# Altium PCB PCB1 - Copy.PcbDoc (part 2 of 2)
Units mil, origin at the board's own origin, x right, y up, seen from the top; angles counter-clockwise.
Board outline 4250 x 4000 mil, 2 copper layers (Top Layer, Bottom Layer); 130 components, 77 nets, 452 pads, 327 vias.
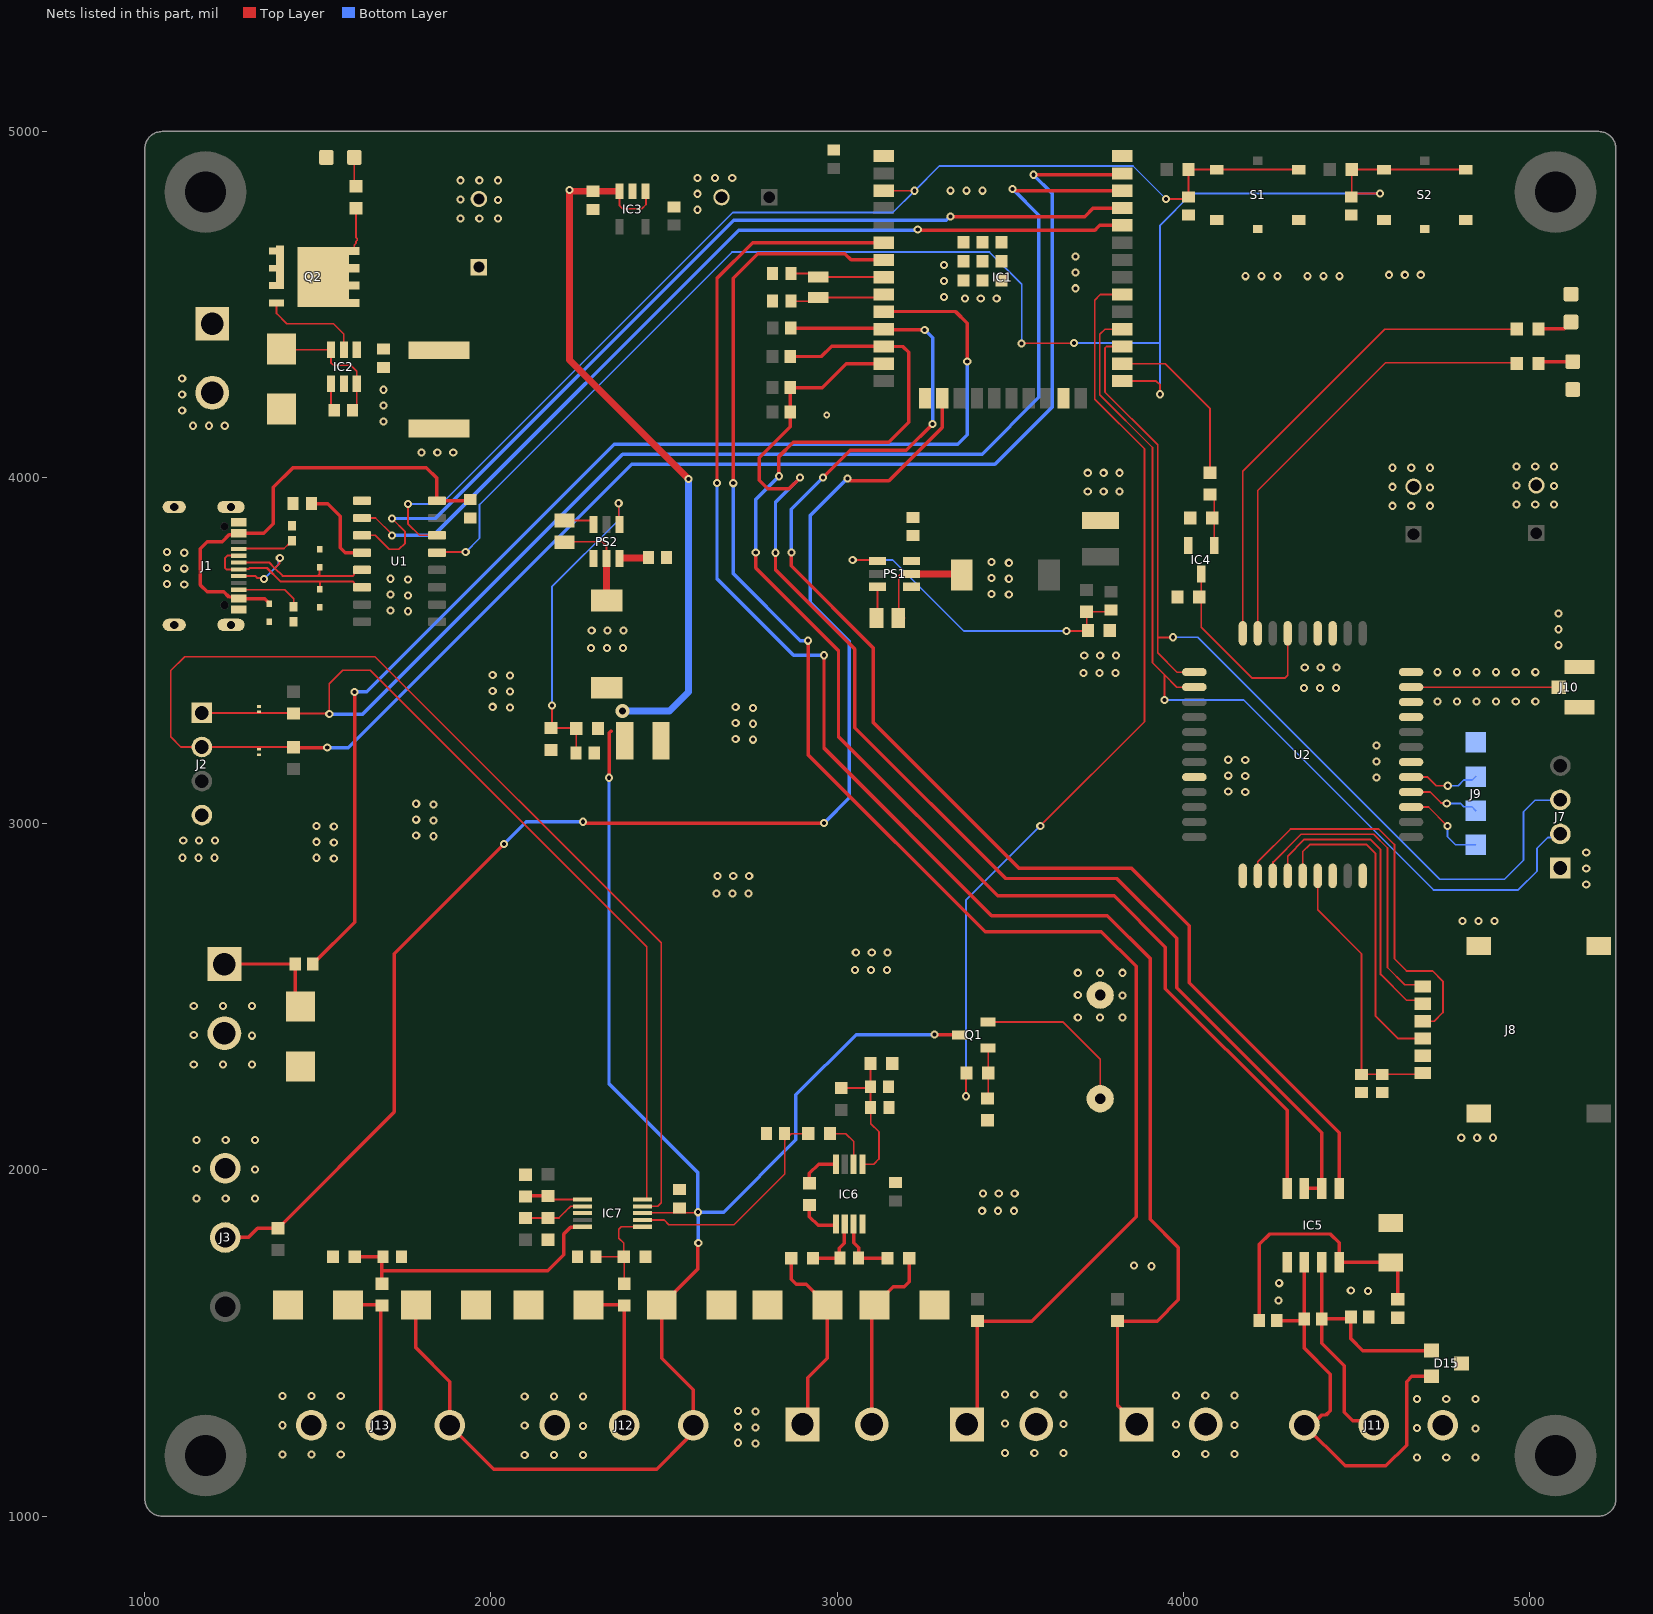
[diagram p2: the nets of this part, all layers, seen from the top]

## Via types
v1: diameter 23.62, hole 11.81, Top Layer to Bottom Layer, 324 vias
v2: diameter 39.37, hole 19.68, Top Layer to Bottom Layer, 1 vias
v3: diameter 78.74, hole 39.37, Top Layer to Bottom Layer, 1 vias
v4: diameter 19.68, hole 9.84, Top Layer to Bottom Layer, 1 vias

## Nets (pads, with @x,y where several pads share a name; then routed paths per layer and width w, separated by ;. In a path a pad name is that pad's centre, name@x,y a point inside that pad or via, vN(x,y) a via of type N, cw(c..) or ccw(c..) an arc to the next point about the centre after c; other vN are vias at no path point) (continued)
+5: C11.1 C22.2 C23.2 C33.1 D11.1 D12.1 IC3.1 IC3.3 IC7.8 J12.3 J13.3 L3.2 Q1.3 R15.2 | length 6728.6
  Top Layer w5: IC3.3@2371.6,4827.18 2371.6,4785.4 2380,4777 2436,4777 2448,4789 2448,4825.58 IC3.1@2446.4,4827.18 ; IC7.8@2438.23,1875.32 2439.51,1876.59 2596.59,1876.59 v1(2598,1878)
  Top Layer w10: D12.1@1783.39,1610 1783.39,1486.61 1881.36,1388.64 J13.3@1881.36,1263.03 2008.4,1136 2478.93,1136 2563.41,1220.47 2584.7,1241.77 2584.7,1365.3 2493.39,1456.61 D11.1@2493.39,1610 2494.37,1610 2531.69,1647.32 2531.69,1648.31 2598,1714.61 2598,1788 v1(2599,1789) ; v1(2341,3133) 2341.72,3133.72 2341.72,3262.72 2347,3268 ; v1(3281,2391) 3281.5,2390.5 3353.16,2390.5 Q1.3@3353.66,2390
  Top Layer w20: IC3.3@2371.6,4827.18 2371.5,4827.28 2295.1,4827.28 C11.1@2295,4827.38 2231.6,4827.38 2227.98,4831 v1(2227,4831) 2227,4340 v1(2571,3996)
  Bottom Layer w10: v1(2341,3133) 2341,2249 2598,1992 v1(2598,1878) ; v1(2599,1789) 2598.5,1789.5 2598.5,1877.5 v1(2598,1878) ; v1(3281,2391) 3055,2391 2881,2217 2881,2087 2672,1878 v1(2598,1878)
  Bottom Layer w20: v2(2380,3326) 2516,3326 2571,3381 v1(2571,3996)
+5V: C28.2 C29.2 IC5.8 R22.2 | length 794.6
  Top Layer w10: R22.2@4219.41,1565 4220,1565.59 4220,1785 4250,1815 4425,1815 4450,1790 IC5.8@4450,1733.23 4599.69,1733.23 C29.2@4600,1732.91 4620,1712.91 C28.2@4620,1626.57
+VIN: C8.1 C9.2 C10.1 C17.2 C21.2 IC2.4 PS1.3 PS2.3 Q2.5 Q2.6 Q2.7 Q2.8 Q2.9 R12.1 | length 218.3
  Top Layer w5: Q2.8@1605.16,4655 1605.16,4671.81 1610.16,4676.81 1610.16,4682.16 1613.93,4685.93 1613.93,4690.07 1610,4694 R12.1@1610,4778.5 R12.1@1613.5,4775
  Top Layer w20: PS2.3@2371.4,3765.79 2373.01,3767.39 2453.02,3767.39 C21.2@2454.62,3769
ADC_1: C31.1 IC7.5 R31.2 R32.1 | length 828.7
  Top Layer w10: R32.1@1606.5,1749.25 1688.43,1749.25 C31.1@1688.62,1749.06 1685,1745.43 1685,1708.46 ; R31.2@1685,1671.5 1685,1708.46 ; IC7.5@2265,1834.72 2229.72,1834.72 2210,1815 2210,1755 2163.46,1708.46 1685,1708.46
ADC_2: C30.1 IC7.6 R29.2 R30.1 | length 316.4
  Top Layer w5: C30.1@2303.27,1749.06 2303.46,1749.25 R30.1@2383.5,1749.25 ; R29.2@2385,1671.5 2385,1747.76 R30.1@2383.5,1749.25 ; IC7.6@2438.23,1835.94 2375.94,1835.94 2369.14,1829.14 2369.14,1803.23 2383.5,1788.87 R30.1@2383.5,1749.25
BOOT: C5.1 IC1.25 R4.1 S2.1 S2.2 U1.13 | length 4511.8
  Top Layer w5: U1.13@1844.05,3783.43 1845.62,3785 v1(1927,3785) ; v1(3533,4388) 3533.5,4388.5 3683.5,4388.5 v1(3684,4389) ; IC1.25@3823.43,4278.94 3922.06,4278.94 3933,4268 v1(3933,4241) ; C5.1@4485,4811.38 C5.1@4486.5,4812.87 ; v1(4568,4821) 4494.62,4821 C5.1@4486.5,4812.87 ; S2.2@4816.22,4890 S2.1@4580,4890 R4.1@4486.5,4890 C5.1@4486.5,4812.87
  Bottom Layer w5: v1(1927,3785) 1966.75,3824.75 1966.75,3922.13 2696.62,4652 3440,4652 3533,4559 v1(3533,4388) ; v1(3684,4389) 3933,4389 ; v1(3933,4241) 3933,4389 ; v1(4568,4821) 4025,4821 3933,4729 3933,4389
BUZZER: IC1.30 R8.2 | length 2727
  Top Layer w5: v1(3372,2213) 3372,2278.5 R8.2@3373.5,2280 ; v1(3587,2994) 3888,3295 3888,4083 3744,4227 3744,4513 3759.94,4528.94 IC1.30@3823.43,4528.94
  Bottom Layer w5: v1(3372,2213) 3372,2779 v1(3587,2994)
DAC_1: IC1.10 R33.1 | length 3491.7
  Top Layer w10: R33.1@1485.59,2595 1606,2715.41 v1(1606,3381) ; IC1.10@3134.45,4478.94 3135.51,4480 3342,4480 3376,4446 v1(3376,4336)
  Bottom Layer w10: v1(1606,3381) 1641,3381 2356,4096 3348,4096 3376,4124 v1(3376,4336)
DBG_RX: IC1.35 U1.3 | length 2716.3
  Top Layer w5: U1.3@1627.52,3833.43 1665.57,3833.43 1706,3793 1734,3793 1751.86,3810.86 1751.86,3844.14 v1(1714,3882)
  Top Layer w10: v1(3328,4754) 3715,4754 3739.94,4778.94 IC1.35@3823.43,4778.94
  Bottom Layer w10: v1(1714,3882) 1839,3882 2701,4744 3315.33,4744 3325.33,4754 v1(3328,4754)
DBG_TX: IC1.34 U1.2 | length 2591.8
  Top Layer w5: U1.2@1627.52,3883.43 1666.57,3883.43 1714,3836 v1(1714,3833) v1@1713.79,3833.21
  Top Layer w10: v1(3233,4717.19) 3235.19,4715 3745,4715 3753,4723 3753,4723.08 3758.86,4728.94 IC1.34@3823.43,4728.94
  Bottom Layer w10: v1(1714,3833) 1834,3833 2716,4715 3230.81,4715 v1(3233,4717.19)
DE: IC1.13 IC5.2 IC5.3 R24.1 R25.1 | length 3718.6
  Top Layer w10: v1(2822,3783) 2822,3734 3051,3505 3051,3278 3487,2842 3808.14,2842 3981,2669.14 3981,2526 4400,2107 IC5.2@4400,1946.77 IC5.3@4350,1946.77 ; v1(2893,4000) 2861,3968 2800,3968 2775,3993 2775,4058 2864.59,4147.59 R24.1@2864.59,4190 R25.1@2864.59,4260 2957,4260 3026,4329 3134.39,4329 IC1.13@3134.45,4328.94
  Bottom Layer w10: v1(2822,3783) 2822,3929 v1(2893,4000)
DI: IC1.12 IC5.4 R23.1 | length 3954.9
  Top Layer w10: v1(2765,3784) 2765,3739 3004,3500 3004,3252 3464,2792 3800,2792 3948,2644 3948,2524 4300,2172 IC5.4@4300,1946.77 ; v1(2832,4004) 2832,4061 2873,4102 3149,4102 3207,4160 3207,4362 3190.06,4378.94 IC1.12@3134.45,4378.94 3133.39,4380 2984,4380 2954,4350 R23.1@2864.59,4350
  Bottom Layer w10: v1(2765,3784) 2765,3937 v1(2832,4004)
DIF_ADC: C36.1 IC7.7 R41.2 | length 669.1
  Top Layer w5: IC7.7@2438.23,1855.63 2500.37,1855.63 2514,1842 2702,1842 2848.38,1988.38 2848.38,2086.38 ; C36.1@2848.38,2105.2 2848.38,2086.38 ; R41.2@2916.5,2105 2867,2105 2856.51,2094.51 2848.38,2086.38
DIGITAL_IN: IC1.6 J4.1 R9.1 | length 4797.2
  Top Layer w10: v1(2653,3985) 2653,4576 2755.94,4678.94 IC1.6@3134.45,4678.94 ; v1(2962.05,3486.9) 2962.05,3218.95 3446,2735 3780,2735 3904,2611 3904,1858 3986,1776 3986,1625 3924.5,1563.5 R9.1@3810,1563.5 3810,1320 J4.1@3865,1265
  Bottom Layer w10: v1(2653,3985) 2653,3708 2874.1,3486.9 v1(2962.05,3486.9)
FLOAT_IN: IC1.7 J5.1 R10.1 | length 4769
  Top Layer w10: v1(2700,3984) 2700,4576 2771,4647 3022,4647 3040.06,4628.94 IC1.7@3134.45,4628.94 ; v1(2916,3529) 2916,3200 3427.5,2688.5 3763.5,2688.5 3864,2588 3864,1865 3562.5,1563.5 R10.1@3405,1563.5 3405,1295 J5.1@3375,1265
  Bottom Layer w10: v1(2700,3984) 2700,3723 2894,3529 v1(2916,3529)
GND: C1.1 C2.1 C3.2 C4.2 C5.2 C6.1 C7.1 C8.2 C9.1 C10.2 C11.2 C12.2 C17.1 C19.1 C21.1 C23.1 C24.1 C25.1 C26.N C27.N C28.1 C29.1 C30.2 C31.2 C32.2 C33.2 C34.N C36.2 C37.2 C38.2 D1.1 D2.1 D3.1 D4.1 D5.1 D6.2 D7.C D8.C D9.C D10.2 D11.2 D12.2 D13.2 D14.2 D15.3 D16.2 D17.2 IC1.1 IC1.15 IC1.38 IC1.39 IC1.40 IC1.41 IC1.42 IC1.43 IC1.44 IC1.45 IC1.46 IC1.47 IC2.2 IC3.2 IC4.2 IC5.5 IC6.4 IC7.3 J1.A1_B12 J1.B1_A12 J1.S1 J1.S2 J1.S3 J1.S4 J2.4 J3.1 J4.2 J5.2 J6.2 J7.1 J8.C5 J8.S1 J8.S2 J8.S3 J9.1 J10.2 J10.3 J11.3 J12.1 J13.1 J14.2 LS1.2 PS1.1 PS2.1 R1.2 R2.1 R11.2 R14.1 R16.1 R19.1 R20.2 R28.1 R30.2 R32.2 R39.2 R40.2 R43.1 S1.3 S1.4 S1.G2 S2.3 S2.4 S2.G2 U1.1 U2.8 U2.13 U2.19 U2.21 U2.27 U2.30 U2.31 U2.33 U2.36 U2.37
  other v1: 4675.37,1169.6 4759.68,1169.6 4844,1169.6 2097.37,1176.6 2181.68,1176.6 2266,1176.6 1397.37,1177.6 1481.68,1177.6 1566,1177.6 3979.37,1179.6 4063.68,1179.6 4148,1179.6 3485.37,1182.6 3569.68,1182.6 3654,1182.6 2764,1210 2714,1212 4844,1253 4675.37,1254.6 2764,1256 2714,1258 2266,1260 1566,1261 2097.37,1261.6 1397.37,1262.6 4148,1263 3979.37,1264.6 3654,1266 3485.37,1267.6 2764,1302 2714,1304 4675.37,1338.6 4759.68,1338.6 4844,1338.6 2097.37,1345.6 2181.68,1345.6 2266,1345.6 1397.37,1346.6 1481.68,1346.6 1566,1346.6 3979.37,1348.6 4063.68,1348.6 4148,1348.6 3485.37,1351.6 3569.68,1351.6 3654,1351.6 4275,1623 4534,1650 4484,1652 4277,1673 3908,1722 3858,1724 3419,1882 3465,1882 3511,1882 1149.37,1917.6 1233.68,1917.6 1318,1917.6 3421,1932 3467,1932 3513,1932 1318,2001 1149.37,2002.6 1149.37,2086.6 1233.68,2086.6 1318,2086.6 4803,2093 4849,2093 4895,2093 1141.37,2304.6 1225.68,2304.6 1310,2304.6 1310,2388 1141.37,2389.6 3695.37,2440.6 3759.68,2440.6 3824,2440.6 1141.37,2473.6 1225.68,2473.6 1310,2473.6 3824,2504 3695.37,2505.6 3695.37,2569.6 3759.68,2569.6 3824,2569.6 3052,2578 3098,2578 3144,2578 3054,2628 3100,2628 3146,2628 4807,2719 4853,2719 4899,2719 2652,2799 2698,2799 2744,2799 5164,2825 2654,2849 2700,2849 2746,2849 5164,2871 1546,2900 1109,2902 1155,2902 1201,2902 1496,2902 5164,2917 1546,2946 1496,2948 1111,2952 1157,2952 1203,2952 1834,2964 1784,2966 1546,2992 1496,2994 1834,3010 1784,3012 1834,3056 1784,3058 4179,3092 4130,3093 4558,3134 4179,3138 4130,3139 4558,3180 4179,3184 4130,3185 4558,3226 2757,3243 2707,3245 2757,3289 2707,3291 2757,3335 2055,3336 2707,3337 2005,3338 4734,3353 4790.6,3353 4847.2,3353 4903.8,3353 4960.4,3353 5017,3353 2055,3382 2005,3384 4349,3392 4395,3392 4441,3392 2055,3428 2005,3430 3712,3436 3758,3436 3804,3436 4734,3438 4790.6,3438 4847.2,3438 4903.8,3438 4960.4,3438 5017,3438 4351,3452 4397,3452 4443,3452 3714,3486 3760,3486 3806,3486 2289,3508 2335,3508 2381,3508 5084,3516 2291,3558 2337,3558 2383,3558 5084,3562 5084,3608 1760,3614 1710,3616 1760,3660 1710,3662 3496,3662 3446,3664 1114,3691 1064,3693 1760,3706 1710,3708 3496,3708 3446,3710 1114,3737 1064,3739 3496,3754 3446,3756 1114,3783 1064,3785 4604.37,3918.6 4658.68,3918.6 4713,3918.6 4962.37,3922.6 5016.68,3922.6 5071,3922.6 3724,3960 3770,3960 3816,3960 4713,3972 4604.37,3973.6 5071,3976 4962.37,3977.6 3724,4014 3770,4014 3816,4014 4604.37,4028.6 4658.68,4028.6 4713,4028.6 4962.37,4032.6 5016.68,4032.6 5071,4032.6 1799,4073 1845,4073 1891,4073 1139,4150 1185,4150 1231,4150 1690,4162 1108,4194 1690,4208 1108,4240 1690,4254 1108,4286 3369,4518 3415,4518 3461,4518 3309,4522 3689,4547 3309,4568 4180,4582 4226,4582 4272,4582 4359,4582 4405,4582 4451,4582 4594,4586 4640,4586 4686,4586 3689,4593 3309,4614 3689,4639 1912,4749 1966.32,4749 2020.63,4749 2597,4774 2020.63,4802.4 1912,4804 2597,4820 3328,4829 3374,4829 3420,4829 1912,4859 1966.32,4859 2020.63,4859 2597,4866 2647,4866 2697,4866
  other v4: 2970,4181
I2C_1_CLK: D4.2 IC1.37 IC7.9 J2.2 R6.1 | length 6700.8
  Top Layer w5: R6.1@1430,3236.5 1417.28,3223.78 1412.37,3223.78 1410.44,3221.85 J2.2@1165,3221.85 1104.15,3221.85 1075,3251 1075,3443 1115,3483 1665,3483 2492,2656 2492,1905 2482,1895 IC7.9@2438.23,1895
  Top Layer w10: R6.1@1430,3221.5 1431.5,3220 v1(1527,3220) ; v1(3567,4875) 3819.49,4875 IC1.37@3823.43,4878.94
  Bottom Layer w10: v1(1527,3220) 1588,3220 2407,4039 3456,4039 3621,4204 3621,4821 v1(3567,4875)
I2C_1_SDA: D5.2 IC1.36 IC7.10 J2.1 R5.1 | length 5831.2
  Top Layer w5: J2.1@1165,3320.28 1428.23,3320.28 R5.1@1430,3318.5 1531.5,3318.5 v1(1533,3317) 1533,3405 1572,3444 1651,3444 2450.02,2644.98 IC7.10@2450.02,1916.3
  Top Layer w10: v1(3507,4834) 3510.69,4834 3515.75,4828.94 IC1.36@3823.43,4828.94
  Bottom Layer w10: v1(1533,3317) 1629,3317 2380,4068 3419,4068 3583,4232 3583,4758 v1(3507,4834)
LSE_OSC_IN: C7.2 IC1.8 Y1.1 | length 272.7
  Top Layer w5: C7.2@2866.38,4590 2934.53,4590 Y1.1@2945,4579.53 3133.86,4579.53 IC1.8@3134.45,4578.94
LSE_OSC_OUT: C6.2 IC1.9 Y1.2 | length 275.9
  Top Layer w5: C6.2@2866.38,4510 2934.53,4510 Y1.2@2945,4520.47 3125.98,4520.47 IC1.9@3134.45,4528.94
NetC2_2: C2.2 U1.4 | length 258.1
  Top Layer w10: C2.2@1481.38,3925 1528,3925 1565,3888 1565,3797 1578.57,3783.43 U1.4@1627.52,3783.43
NetC15_1: C15.1 D6.1 IC2.3 IC2.6 J6.1 Q2.1 Q2.2 Q2.3 Q2.10 | length 383.2
  Top Layer w5: D6.1@1395,4371.61 1397.4,4369.21 IC2.6@1537.6,4369.21 1537.6,4332.4 1545,4325 1595,4325 1612.4,4307.6 IC2.3@1612.4,4270.79 1612.4,4207.4 C15.1@1600,4195
NetC15_2: C15.2 IC2.1 | length 79.8
  Top Layer w5: IC2.1@1537.6,4270.79 1537.6,4204.65 C15.2@1547.24,4195
NetC16_1: C16.1 L2.1 PS1.2 | length 339
  Top Layer w5: C16.1@3170.07,3619.17 C16.1@3195.24,3594 ; C16.1@3178.07,3619.17 3178.07,3716.07 3186,3724 PS1.2@3215.21,3724 ; L2.1@3340.02,3739 L2.1@3360.02,3719
  Top Layer w20: PS1.2@3223.58,3722.19 3356.83,3722.19 L2.1@3360.02,3719
NetC16_2: C16.2 PS1.6 | length 94.6
  Top Layer w5: PS1.6@3116.79,3686.6 3116.79,3598.72 C16.2@3121.5,3594
NetC18_1: C18.1 PS1.4 R13.1 R14.2 | length 965.2
  Top Layer w5: v1(3045,3762) 3114.19,3762 PS1.4@3116.79,3759.4 ; v1(3663,3557) 3722.5,3557 R14.2@3724.5,3559 3721,3562.5 R13.1@3721,3612.5 3785.88,3612.5 C18.1@3791,3617.62
  Bottom Layer w5: v1(3045,3762) 3161,3762 3366,3557 v1(3663,3557)
NetC20_1: C20.1 L3.1 PS2.2 | length 283
  Top Layer w5: C20.1@2214,3815 2322,3815 2334,3803 PS2.2@2334,3765.79
  Top Layer w20: L3.1@2334,3645 PS2.2@2334,3765.79
NetC20_2: C20.2 PS2.6 | length 91.4
  Top Layer w5: C20.2@2212,3876.5 2287.29,3876.5 2296.6,3867.19 PS2.6@2296.6,3864.21
NetC22_1: C22.1 PS2.4 R15.1 R16.2 | length 938.4
  Top Layer w5: v1(2176,3342) 2176,3278.5 R16.2@2174,3276.5 2244.51,3276.5 R15.1@2246.01,3275 2246.01,3211.61 C22.1@2252.62,3205 ; v1(2369,3926) 2369,3866.61 PS2.4@2371.4,3864.21
  Bottom Layer w5: v1(2176,3342) 2176,3684.84 2369,3877.84 v1(2369,3926)
NetC35_1: C35.1 IC6.2 R35.2 | length 176.3
  Top Layer w10: R35.2@2930.5,1745 3001.5,1745 3004.54,1745 C35.1@3004.73,1745.2 ; C35.1@3001.5,1750 3005.65,1754.15 3005.65,1773.65 3020.47,1788.47 3020.47,1841.65 IC6.2@3022.2,1843.39
NetC35_2: C35.2 IC6.3 R36.2 | length 187.1
  Top Layer w10: IC6.3@3047.8,1843.39 3047.8,1790.2 3062.9,1775.1 C35.2@3062.9,1750.61 ; C35.2@3057.49,1745.2 3057.69,1745 R36.2@3145.5,1745
NetC37_1: C37.1 C38.1 IC6.5 R42.1 R43.2 | length 425.9
  Top Layer w5: R42.1@3012,2236.5 3092.06,2236.5 C38.1@3096.06,2240.5 ; IC6.5@3073.39,2016.61 3105.61,2016.61 3121,2032 3121,2110 3097.06,2133.94 C37.1@3097.06,2180.5 3096.5,2181.06 R43.2@3096.5,2308
NetD7_A: D7.A R12.2 | length 85.4
  Top Layer w5: D7.A@1605.35,4925 1605.35,4846.14 R12.2@1610,4841.5
NetD8_A: D8.A R17.2 | length 100.7
  Top Layer w10: R17.2@5026.5,4330 5031.85,4335.35 D8.A@5125,4335.35
NetD9_A: D9.A R21.2 | length 101.6
  Top Layer w10: R21.2@5026.5,4430 5100.01,4430 5119.66,4449.65 D9.A@5120,4449.65
NetD10_1: D10.1 J12.2 R29.1 | length 449.6
  Top Layer w10: D10.1@2281.61,1610 2383.5,1610 R29.1@2385,1608.5 2384.7,1608.2 J12.2@2384.7,1263.03
NetD13_1: D13.1 J13.2 R31.1 | length 446
  Top Layer w10: D13.1@1586.61,1610 1683.5,1610 R31.1@1685,1608.5 1681.36,1604.87 J13.2@1681.36,1263.03
NetD14_1: D14.1 J14.1 R33.2 | length 334.3
  Top Layer w10: J14.1@1230,2595 R33.2@1434.41,2595 1434.41,2487.2 D14.1@1450,2471.61
NetD15_1: D15.1 IC5.7 J11.2 R27.2 R28.2 | length 955.5
  Top Layer w10: IC5.7@4400,1733.23 4400,1570.59 R27.2@4400.59,1570 ; J11.2@4550,1263.03 4538.03,1275 4490,1275 4465,1300 4465,1435 4400.59,1499.41 R27.2@4400.59,1570 ; D15.1@4716.69,1478.4 4716.29,1478 4519,1478 4484.41,1512.59 R28.2@4484.41,1575 4479.41,1570 R27.2@4400.59,1570
NetD15_2: D15.2 IC5.6 J11.1 R22.1 R27.1 | length 1263
  Top Layer w10: R22.1@4270.59,1565 4344.41,1565 R27.1@4349.41,1570 ; IC5.6@4350,1733.23 4350,1570.59 R27.1@4349.41,1570 ; D15.2@4716.69,1403.6 4660.6,1403.6 4645,1388 4645,1205 4585,1145 4468.03,1145 J11.1@4350,1263.03 4371.26,1263.03 4400.44,1292.21 4412.21,1292.21 4425,1305 4425,1410 4349.41,1485.59 R27.1@4349.41,1570
NetD16_1: D16.1 J15.2 R36.1 | length 540
  Top Layer w10: J15.2@3100,1265 3100,1601.61 D16.1@3108.39,1610 3109.37,1610 3162.37,1663 3194,1663 3208.5,1677.5 R36.1@3208.5,1741
NetD17_1: D17.1 J15.1 R35.1 | length 570.1
  Top Layer w10: R35.1@2867.5,1745 2867.5,1684.5 2882,1670 2910.63,1670 2970.63,1610 D17.1@2971.61,1610 2971.61,1456.61 2915,1400 2915,1280 J15.1@2900,1265
NetIC2_5: IC2.5 Q2.4 | length 295.3
  Top Layer w5: Q2.4@1380.75,4505 1380.75,4474.25 1410,4445 1545,4445 1575,4415 IC2.5@1575,4369.21
NetIC4_1: IC4.1 R18.1 R19.2 | length 152.4
  Top Layer w5: R18.1@4077,3951.5 4089.6,3938.91 IC4.1@4089.6,3804.34
NetIC4_3: IC4.3 R20.1 U2.39 | length 593.1
  Top Layer w5: IC4.3@4052,3721.66 4052,3660.5 R20.1@4046.5,3655 4052,3649.5 4052,3568 4199,3421 4293,3421 4301.69,3429.69 U2.39@4301.69,3550.39
NetIC6_1: IC6.1 R34.1 | length 121.9
  Top Layer w10: R34.1@2920,1898.5 2920,1865 2945,1840 2993.23,1840 IC6.1@2996.61,1843.39
NetIC6_6: IC6.6 R41.1 | length 143.3
  Top Layer w5: R41.1@2979.5,2105 3025,2105 3047.8,2082.2 IC6.6@3047.8,2016.61
NetIC6_8: IC6.8 R34.2 | length 116.1
  Top Layer w10: R34.2@2920,1961.5 2920,1990 2946.61,2016.61 IC6.8@2996.61,2016.61
NetIC7_1: IC7.1 R38.2 R40.1 | length 169.9
  Top Layer w5: R38.2@2165,1925 2175.31,1914.69 IC7.1@2265,1914.69
  Top Layer w10: R40.1@2100,1923.5 2101.5,1925 R38.2@2165,1925
NetIC7_2: IC7.2 R37.2 R39.1 | length 183.9
  Top Layer w5: R37.2@2095,1861.5 R37.2@2100,1861.5 R39.1@2165,1861.5 2196.5,1861.5 2215,1880 2230,1895 IC7.2@2265,1895
NetJ1_A5: J1.A5 R1.1 | length 164.3
  Top Layer w5: J1.A5@1272.01,3794.21 1273.23,3795.43 1402.24,3795.43 1413.88,3807.07 1415.85,3807.07 1425.16,3816.38 R1.1@1425.16,3818.35
NetJ1_B5: J1.B5 R2.2 | length 192.2
  Top Layer w5: J1.B5@1272.01,3676.1 1403.9,3676.1 1430,3650 R2.2@1430,3626.65
NetJ9_2: J9.2 U2.26 | length 208.4
  Top Layer w5: U2.26@4657.99,3135.04 4705.96,3135.04 4731,3110 v1(4764,3110)
  Bottom Layer w5: v1(4764,3110) 4794,3110 4810.74,3126.74 4835.17,3126.74 J9.2@4845,3136.57
NetJ9_3: J9.3 U2.25 | length 209.2
  Top Layer w5: U2.25@4657.99,3091.73 4713.27,3091.73 4744.85,3060.15 4759.85,3060.15 v1(4761,3059)
  Bottom Layer w5: v1(4761,3059) 4801,3059 4810.74,3049.26 4833.89,3049.26 J9.3@4845,3038.15
NetJ9_4: J9.4 U2.24 | length 250.1
  Top Layer w5: U2.24@4657.99,3048.43 4708.42,3048.43 v1(4763.35,2993.49)
  Bottom Layer w5: v1(4763.35,2993.49) 4763.35,2962.65 4786.28,2939.72 J9.4@4845,2939.72
NetJ10_1: J10.1 U2.32 | length 429
  Top Layer w5: U2.32@4657.99,3394.88 5080.08,3394.88 J10.1@5084.96,3390
NetLS1_1: LS1.1 Q1.2 | length 482.5
  Top Layer w5: Q1.2@3436.34,2427.8 3652.2,2427.8 3760,2320 LS1.1@3760,2205.79
NetQ1_1: Q1.1 R8.1 R11.1 | length 146.3
  Top Layer w5: R11.1@3435,2206.5 3436.34,2207.83 Q1.1@3436.34,2352.2
NetR17_1: R17.1 U2.41 | length 1314.8
  Top Layer w5: U2.41@4215.08,3550.39 4215.08,3963.08 4584,4332 4961.5,4332 R17.1@4963.5,4330
NetR21_1: R21.1 U2.42 | length 1430.4
  Top Layer w5: U2.42@4171.77,3550.39 4171.77,4018.77 4582,4429 4962.5,4429 R21.1@4963.5,4430
NRST: C4.1 IC1.3 R3.1 S1.1 S1.2 U1.14 | length 3372.3
  Top Layer w5: v1(1760,3924) 1760,3867.02 1793.6,3833.43 U1.14@1844.05,3833.43 ; IC1.3@3134.45,4828.94 v1(3224,4828.94) ; v1(3950,4805) 4008.62,4805 C4.1@4015,4811.38 R3.1@4015,4873.8 ; S1.2@4333.11,4890 4035,4890 ; R3.1@4015,4873.8 R3.1@4015,4890 4035,4890 ; R3.1@4015,4873.8 4020.71,4879.51 4024.51,4879.51 4024.51,4884.29 4030.22,4890 4035,4890
  Bottom Layer w5: v1(1760,3924) 1856.25,3924 2698.25,4766 3161.06,4766 v1(3224,4828.94) 3295.37,4900.31 3854.69,4900.31 v1(3950,4805)
RO: IC1.11 IC5.1 R26.1 | length 3989.6
  Top Layer w10: R26.1@2865.59,4432 3131.39,4432 IC1.11@3134.45,4428.94 3136.39,4427 v1(3253,4427) ; v1(2868,3784) 2867,3783 2867,3745 3105,3507 3105,3292 3526,2871 3851,2871 4017,2705 4017,2541 4450,2108 IC5.1@4450,1946.77 ; v1(2959,4000) 3037.8,4078.8 3199.8,4078.8 v1(3276,4155)
  Bottom Layer w10: v1(2868,3784) 2868,3909 v1(2959,4000) ; v1(3253,4427) 3276,4404 v1(3276,4155)
SIM_CLK: J8.C3 U2.16 | length 875.3
  Top Layer w5: U2.16@4301.69,2849.61 4301.69,2906.69 4350,2955 4540,2955 4570,2925 4570,2565 4645,2490 4682.28,2490 J8.C3@4692.28,2480
SIM_DATA: J8.C7 U2.15 | length 890.8
  Top Layer w5: U2.15@4258.39,2849.61 4259.46,2850.68 4259.46,2889.46 4340,2970 4550,2970 4590,2930 4590,2585 4640,2535 4687.28,2535 J8.C7@4692.28,2530
SIM_DET: J8.C6 U2.14 | length 1148.3
  Top Layer w5: U2.14@4215.08,2849.61 4215.08,2890.08 4310,2985 4565,2985 4610,2940 4610,2610 4645,2575 4720,2575 4750,2545 4750,2455 4725,2430 J8.C6@4692.28,2430
SIM_EN: IC1.26 R18.2 | length 492.5
  Top Layer w5: IC1.26@3823.43,4328.94 3948.06,4328.94 4077,4200 R18.2@4077,4014.5
SIM_RST: J8.C2 U2.17 | length 933.2
  Top Layer w5: U2.17@4345,2849.61 4345,2920 4365,2940 4530,2940 4555,2915 4555,2445 4620,2380 J8.C2@4692.28,2380
SIM_RX: IC1.27 J7.3 U2.1 | length 2754.3
  Top Layer w5: IC1.27@3823.43,4378.94 3778.06,4378.94 3774,4374.87 3774,4247 3926,4095 3926,3538 ; v1(3970,3539) 3969,3538 3926,3538 ; U2.1@4032.01,3438.19 3981.81,3438.19 3926,3494 3926,3538
  Bottom Layer w5: v1(3970,3539) 4042,3539 4741,2840 4928,2840 4983,2895 4983,3035 5016,3068 5088.12,3068 J7.3@5089.33,3069.21
SIM_TX: IC1.28 J7.2 U2.2 | length 2781
  Top Layer w5: IC1.28@3823.43,4428.94 3773.94,4428.94 3759,4414 3759,4239 3911,4087 3911,3465 3946.06,3429.94 ; v1(3946,3358) 3946.06,3358.06 3946.06,3429.94 ; U2.2@4032.01,3394.88 3981.12,3394.88 3946.06,3429.94
  Bottom Layer w5: v1(3946,3358) 4174,3358 4723,2809 4968,2809 5022,2863 5022,2929 5053.38,2960.38 5078.93,2960.38 J7.2@5089.33,2970.79
SIM_VDD: C24.2 C25.2 J8.C1 U2.18 | length 804.5
  Top Layer w5: U2.18@4388.31,2849.61 4388.31,2751.69 4515,2625 C24.2@4515,2276.38 C25.2@4575,2276.38 4688.66,2276.38 J8.C1@4692.28,2280
TMP: IC1.16 J3.2 R7.1 | length 4040.7
  Top Layer w10: J3.2@1231.97,1805 1299.02,1805 1325.51,1831.5 R7.1@1385,1831.5 1385.98,1831.5 1398.7,1844.21 1398.7,1845.2 1721,2167.5 1721,2625 v1(2038,2942) ; v1(2266,3006) 2270,3002 v1(2962,3002) ; v1(3030,3998) 3030,3996.86 3035.86,3991 3149.92,3991 3303.94,4145.02 IC1.16@3303.94,4229.72
  Bottom Layer w10: v1(2038,2942) 2102,3006 v1(2266,3006) ; v1(2962,3002) 3035,3075 3035,3527 2923,3639 2923,3891 v1(3030,3998)
U0TXD_MTDO_P_CTL: IC1.23
USB_N: D3.2 J1.A7 J1.B7 U1.6 | length 514.7
  Top Layer w5.91: J1.B7@1272.01,3774.53 1238.32,3774.53 1231.84,3768.05 1231.84,3763.16 1232,3763 1232,3738.62 1235.46,3735.16 J1.A7@1272.01,3735.16 1272.83,3735.98 1299.81,3735.98 1302.77,3738.94 1352.9,3738.94 1391.36,3700.47 1508,3700.47 ; D3.2@1506,3683 1506,3698.47 1508,3700.47 ; U1.6@1627.52,3683.43 1613.99,3683.43 1604.74,3692.67 1604.74,3696.95 1601.22,3700.47 1508,3700.47
USB_P: D2.2 J1.A6 J1.B6 U1.5 | length 594.7
  Top Layer w5.91: J1.B6@1272.01,3715.47 1319.73,3715.47 1324.82,3710.39 1340.61,3710.39 v1(1344,3707) ; J1.A6@1272.01,3754.84 1359.48,3754.84 1375.66,3738.66 ; v1(1390,3768) 1388.79,3766.79 1388.79,3751.79 1375.66,3738.66 ; D2.2@1505,3737.02 1505,3721.8 1499.58,3716.38 ; U1.5@1627.52,3733.43 1613.99,3733.43 1604.74,3724.18 1604.74,3719.9 1601.22,3716.38 1499.58,3716.38 ; 1375.66,3738.66 1397.94,3716.38 1499.58,3716.38
  Bottom Layer w5.91: v1(1344,3707) 1386.61,3749.61 1386.61,3764.61 v1(1390,3768)
USB_VBUS: C1.2 D1.2 J1.A4_B9 J1.B4_A9 U1.16 | length 1348.7
  Top Layer w10: D1.2@1360,3635.98 1360,3637.56 1347.05,3650.51 J1.B4_A9@1272.01,3650.51 1267.32,3655.2 1243.35,3655.2 1228.55,3670 1180,3670 1160,3690 1160,3742.5 1160,3795 1180,3815 1223.55,3815 1243.35,3834.8 1267.32,3834.8 J1.A4_B9@1272.01,3839.49 1343.49,3839.49 1371,3867 1371,3972 1428,4029 1813,4029 1844.05,3997.95 U1.16@1844.05,3933.43 1937.05,3933.43 C1.2@1940,3936.38 C1.2@1942.38,3934
pads on no net: IC1.4 IC1.5 IC1.14 IC1.17 IC1.18 IC1.19 IC1.20 IC1.21 IC1.22 IC1.24 IC1.29 IC1.31 IC1.32 IC1.33 IC3.4 IC7.4 J1. J1.A8 J1.B8 J8.SW PS1.5 PS2.5 S1.G1 S2.G1 U1.7 U1.8 U1.9 U1.10 U1.11 U1.12 U1.15 U2.3 U2.4 U2.5 U2.6 U2.7 U2.9 U2.10 U2.11 U2.12 U2.20 U2.22 U2.23 U2.28 U2.29 U2.38 U2.40

## Polygon pours and split planes (outlines as drawn)
GND on Top Layer "GND_L01_P008" (solid, pour order 8): 982.28,1085 982.28,4956 cw(c1021.28,4956) 1021.28,4995 5167.28,4995 cw(c5167.28,4950) 5212.28,4950 5212.28,1058 cw(c5169.28,1058) 5169.28,1015 1052.28,1015 cw(c1052.28,1085)
+VIN on Top Layer "+VIN_L01_P000" (solid, pour order 0): 1992,4208 2229,3971 2377,3971 2377,3967 2438,3906 2438,3840 2405,3807 2359,3807 2353,3801 2353,3733 2364,3722 2469,3722 2480,3733 2480,3807 2496,3807 2562,3873 3110,3873 3169,3814 3169,3751 3182,3738 3257,3738 3261,3742 3261,3845.07 3247.5,3858.57 3190.5,3858.57 3120.06,3929 2544,3929 2413,4060 2313,4060 2146,4227 2146,4432 2132,4446 2017,4446 1992,4421
+VIN on Top Layer "+VIN_L01_P007" (solid, pour order 7): 1422,4685 1436,4699 2022,4699 2131,4590 2131,4304 2102,4275 1799,4275 1728,4346 1598,4346 1595,4349 1595,4435 1558,4472 1435,4472 1422,4485
NetC15_1 on Top Layer "NETC15_1_L01_P005" (solid, pour order 5): 1413,4528 1418,4533 1418,4688 1409,4697 1341,4697 1174,4530 1121,4530 1121,4527 1096,4502 1096,4384 1133,4347 1284,4347 1333,4298 1461,4298 1483,4320 1483,4416 1466,4433 1385,4433 1332,4486 1332,4522 1338,4528
+4.1V on Top Layer "+4.1V_L01_P002" (solid, pour order 2): 3556,3809 3826,3809 3846,3789 3846,3664 3826,3644 3566,3644 3546,3664 3546,3799
+5 on Top Layer "+5_L01_P003" (solid, pour order 3): 2274,3174 2274,3444 2294,3464 2419,3464 2439,3444 2439,3184 2419,3164 2284,3164
GND on Bottom Layer "GND_L02_P006" (solid, pour order 6): 1010,1080 1010,4951 cw(c1049,4951) 1049,4990 5195,4990 cw(c5195,4945) 5240,4945 5240,1053 cw(c5197,1053) 5197,1010 1080,1010 cw(c1080,1080)

## Silkscreen, mask and mechanical layers (free items; w line width, h text height)
Top Overlay:
  drawing of 57 lines, arcs and shapes, not listed
  text "RST" at 4171,4951 h30
  text "BOOT" at 4651,4951 h30
  text "STAT" at 5209,4436 h30 r90
  text "NET" at 5209,4256 h30 r90
  text "V_IN" at 1065,4040 h60
  text "EX_GSM" at 4885,2855 h60 r90
  text "I2C" at 1065,2825 h60
  text "DAC" at 1065,2190 h60
  text "NANO SIM" at 4710,2025 h60
  text "ADC_1" at 1540,1420 h60
  text "ADC_2" at 2265,1420 h60
  text "ADC_DIF" at 2820,1420 h60
  text "F_IN" at 3380,1420 h60
  text "D_IN" at 3875,1420 h60
  text "B" at 4530,1410 h60
  text "G" at 4715,1410 h60
  text "A" at 4330,1405 h60
  text "TEMP" at 1065,1375 h60
Mechanical 13:
  lines w10: 1000,1050 ccw(c1050,1050) 1050,1000 5200,1000 ccw(c5200,1050) 5250,1050 5250,4950 ccw(c5200,4950) 5200,5000 4995,5000 1355,5000 1050,5000 ccw(c1050,4950) 1000,4950 1000,1050